# Altium PCB PCB3.PcbDoc
Units mil, origin at the board's own origin, x right, y up, seen from the top; angles counter-clockwise.
Board outline 1180 x 1360 mil, 2 copper layers (Top Layer, Bottom Layer); 12 components, 12 nets, 28 pads, 2 vias.
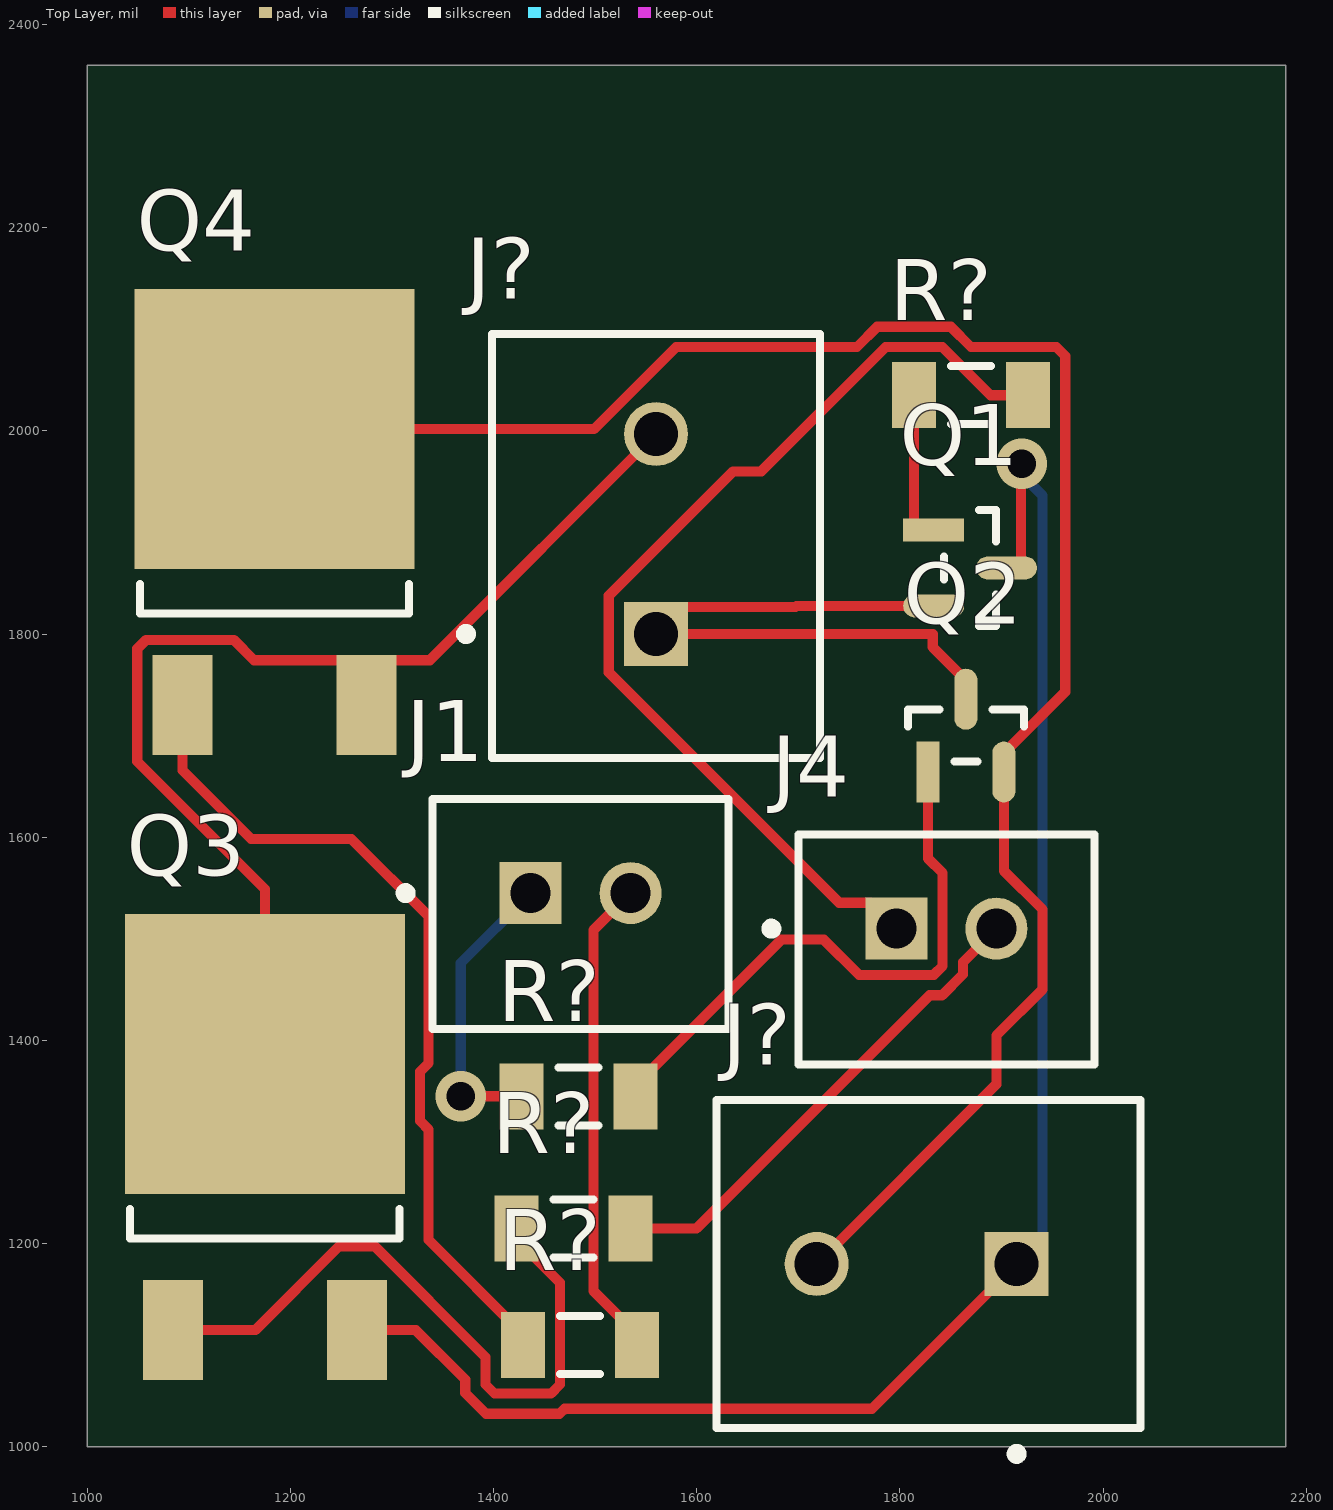
[diagram p0: Top Layer view]
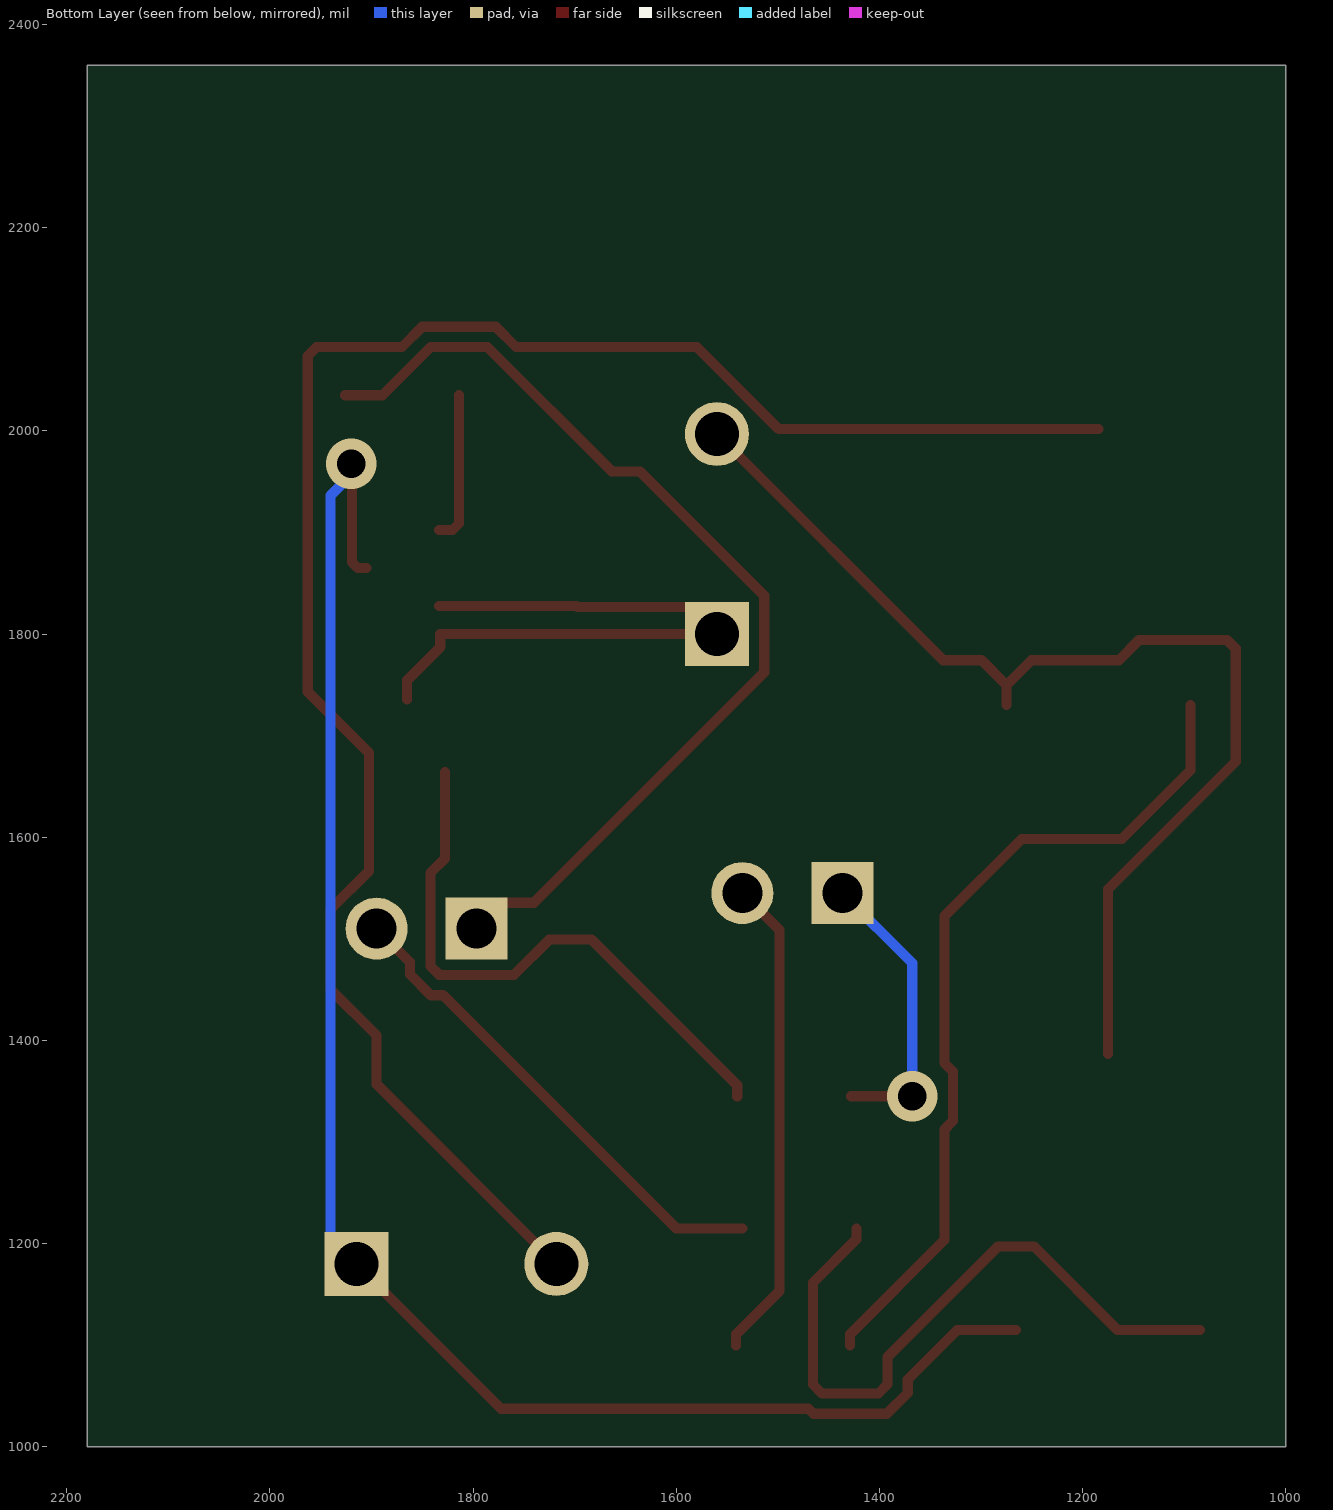
[diagram p1: Bottom Layer view, seen from below]
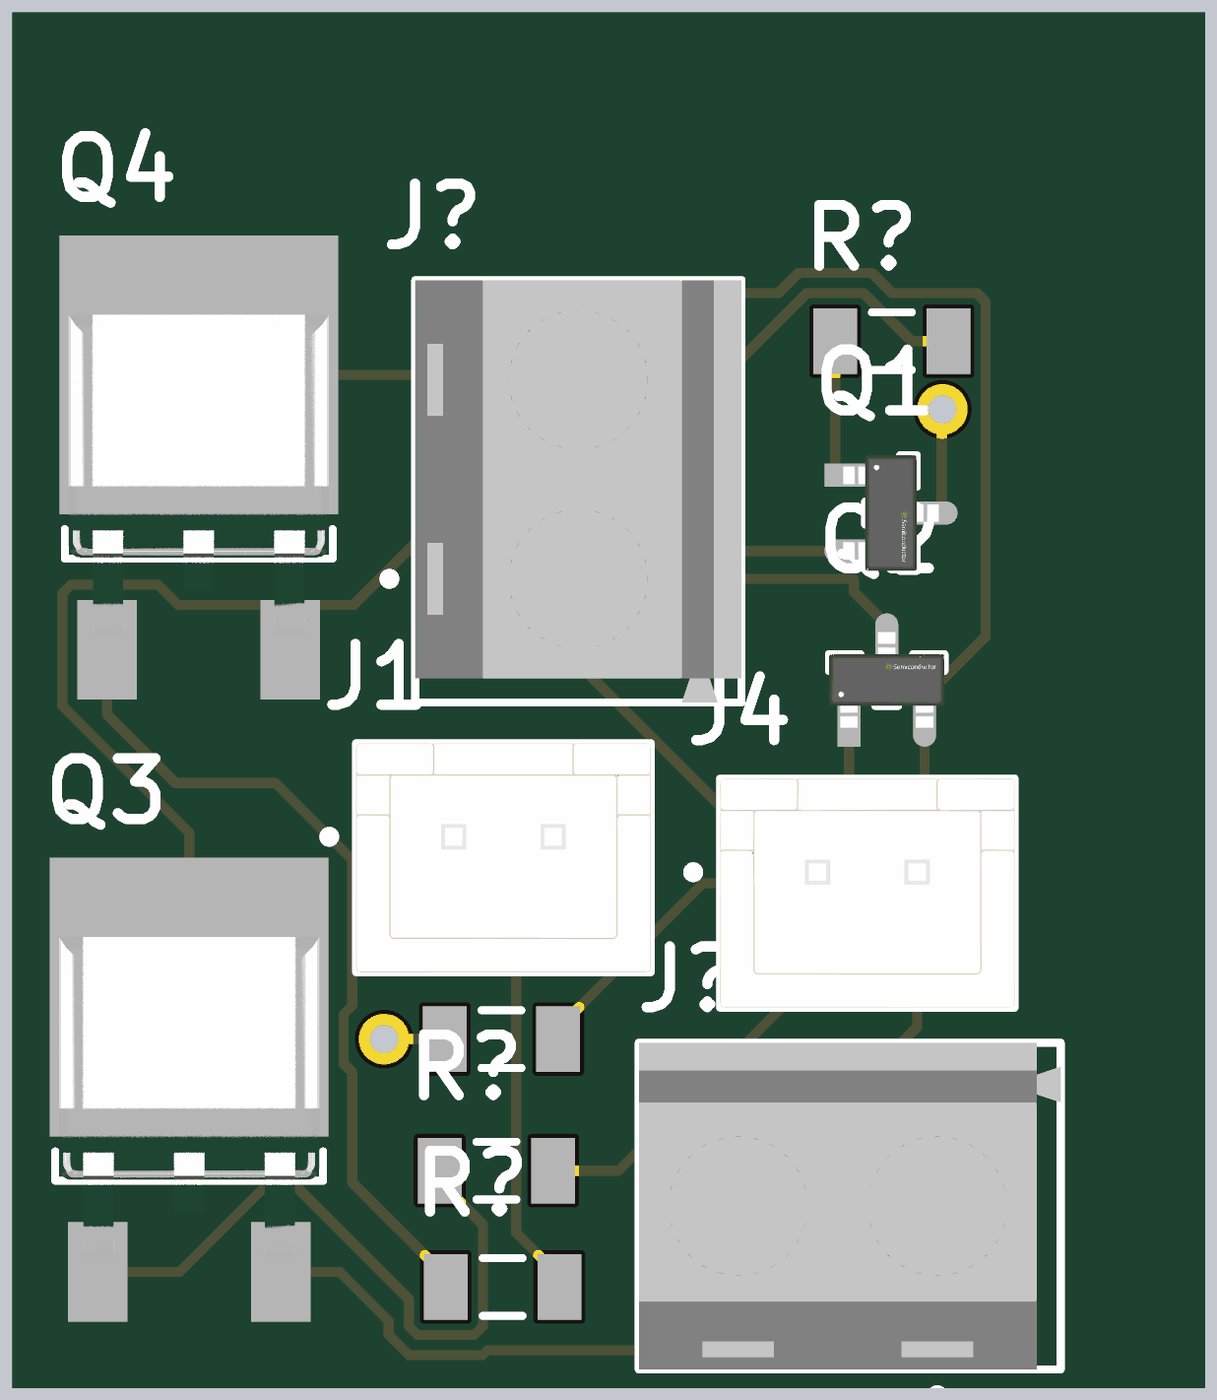
[diagram p2: 3D render of the assembled board from above, using the file's embedded part models]

## Layer stack, top to bottom
Top Solder: solder mask 0.4, Solder Resist, Dk 3.5
Top Layer: signal copper 1.4
Dielectric 1: dielectric 12.6, FR-4, Dk 4.8
Bottom Layer: signal copper 1.4
Bottom Solder: solder mask 0.4, Solder Resist, Dk 3.5

## Board outline
1000,1000 2180,1000 2180,2360 1000,2360

## Design rules (kind name [scope] priority, off if disabled: settings)
Clearance [All] p1: gap=10 ignorepadtopadclearanceinfootprint=FALSE
PolygonConnect [All] p1: connectstyle=Relief reliefconductorwidth=10 reliefentries=4 polygonreliefangle="90 Angle" airgapwidth=10
RoutingVias [All] p1: holewidth=28 width=50 viastyle="Through Hole" minholewidth=28 minwidth=50 maxholewidth=28 maxwidth=50
SolderMaskExpansion [All] p1: expansion=4 istentingtop=FALSE
SupplyNets "Schematic Supply Nets_1" [InNet('+12')] p1: voltage=0.000
SupplyNets "Schematic Supply Nets" [InNet('GND')] p2: voltage=0.000
Width [All] p1: maxlimit=10 minlimit=10 preferedwidth=10
30 further rules are at their usual default settings.

## Classes and differential pairs
component class Sheet1: J1 J4 J? Q1 Q2 Q3 Q4 R?

## Components (designator, comment, footprint, x,y, rotation, side; value= is the part's Value field where it differs from the comment)
J1 "B2B-XH-A(LF)(SN)" FP-B2B-XH-A_LF_SN-MFG 1485.79,1524.33 r0 top
J4 "B2B-XH-A(LF)(SN)" FP-B2B-XH-A_LF_SN-MFG 1845.79,1489.33 r0 top
J? "282836-2" TECO-282836-2_V 1560,1898.43 r90 top
J? "282836-2" TECO-282836-2_V 1816.57,1180 r180 top
Q1 "BSS138" FP-318-08-IPC_B 1869.17,1865 r0 top
Q2 "BSS138" FP-318-08-IPC_B 1865,1700 r90 top
Q3 "IRFR5410TRPBF" FP-PG-TO252-3-MFG 1175,1295 r0 top
Q4 "IRFR5410TRPBF" FP-PG-TO252-3-MFG 1184.45,1910.12 r0 top
R? "ERJ-8GEY0R00V" RESC3216X70X50NL05T20 1870,2035 r0 top
R? "ERJ-8GEY0R00V" RESC3216X70X50NL05T20 1483.9,1345 r0 top
R? "ERJ-8GEY0R00V" RESC3216X70X50NL05T20 1478.9,1215 r0 top
R? "ERJ-8GEY0R00V" RESC3216X70X50NL05T20 1485,1100 r180 top

## Footprints (in the part's own frame and the unit in brackets; to place one, negate y for a bottom-side part, rotate by r counter-clockwise, add the part's x,y. Pads: shape width x height; smd on the part's side, far side on the other; paste and mask are expansions set on the pad)
FP-318-08-IPC_B [mm]
  rect 1.524x0.578 smd paste+0 mask+0: 1(-0.91,0.95)
  rrect100% 1.524x0.578 smd paste+0 mask+0: 2(-0.91,-0.95) 3(0.91,0)
  silkscreen extent -0.65,-1.45 0.65,1.45, body extent -1.92,-1.7 1.92,1.7, height 0.25
FP-B2B-XH-A_LF_SN-MFG [mm]
  rect 1.55x1.55 hole 1 paste-2539.97 mask+0: 1(-1.25,0.525)
  round 1.55 hole 1 paste-2539.97 mask+0: 2(1.25,0.525)
  silkscreen extent -4.5,-2.88 3.7,2.88, body extent -3.8,-2.98 3.8,2.98, height 0.25
FP-PG-TO252-3-MFG [mm]
  rect 1.5x2.5 smd paste+0 mask+0: 1(-2.3,-4.575) 3(2.3,-4.575)
  rect 7x7 smd paste+0 mask+0: 4(0,2.325)
  silkscreen extent -3.36,-2.28 3.36,-1.55, body extent -3.6,-5.92 3.6,5.92, height 0.25
RESC3216X70X50NL05T20 [mm] "Chip Resistor, 2-Leads, Body 3.20x1.60mm, IPC Medium Density"
  rect 1.1x1.65 smd: 1(-1.425,0) 2(1.425,0)
  silkscreen extent -0.5,-0.72 0.5,0.72, body extent -1.63,-0.82 1.62,0.82, height 0.7
TECO-282836-2_V [mm] "Female Header, Pitch 5mm, 1 x 2 Position, Height 10mm"
  rect 1.6x1.6 hole 1.1: 1(-2.5,0)
  round 1.6 hole 1.1: 2(2.5,0)
  silkscreen extent -5.6,-4.1 5,4.87, body extent -5.6,-4.1 5,4.1, height 10

## Part data
J1 J4: library part CMP-2000-05888-3, "CONN HEADER VERT 2POS 2.5MM", Color=Natural, Contact Resistance=20mR, Current Rating=3A, Housing Color=White, Insulation Resistance=1GR, Max Operating Temperature=85°C, Max Voltage Rating (AC)=250V, Min Operating Temperature=-25°C, Connector Type="Male Pin", Contact Material=Brass, Contact Plating=Tin, Contact Type="Male Pin", Depth=5.75mm, Fastening Type=Detent, Housing Material=Polyamide, Lead Free="Lead Free", Lead Pitch=2.5mm, Length=7.4mm, Max Current Rating=3A, Max Voltage Rating (DC)=250V, Mount="Through Hole", Number of Contacts=2, Number of Positions=2, Number of Rows=1, Orientation=Straight, Packaging=Bulk, Pitch=2.5mm, REACH SVHC="No SVHC", Series=XH, Termination=Solder, Voltage Rating=250V, Voltage Rating (AC)=250V, Wire/Cable Gauge=22AWG
J? J?: library part CMP-1684-00017-1, "Female Header, Pitch 5 mm, 1 x 2 Position, Height 10 mm, Tail Length 3.5 mm, Rohs, Bulk", Color=Green, Current=13.5A, Manufacturer="TE Connectivity", Package Description="Female Header, Pitch 5 mm, 1 x 2 Position, Height 10 mm, Tail Length 3.5 mm", Package Reference=THD, Standard Package=300, Voltage=300V, 3D Model=282836-2.pdf, Category=Connectors,Interconnects, Clamp Material - Plating=Brass-NickelPlated, Contact Material - Plating=Brass-TinPlated, Datasheet URL=http://www.te.com.cn/commerce/DocumentDelivery/DDEController?Action=showdoc&DocId=Catalog+Section%7F1308389_EUROSTYLE_TERMINAL_BLOCKS%7F0607%7Fpdf%7FEnglish%7FENG_CS_1308389_EUROSTYLE_TERMINAL_BLOCKS_0607.pdf%7F282836-2, Dynamic Catalog=BuchananSeries, Family=TerminalBlocks-WiretoBoard, Featured Product=EurostyleTerminalBlockConnectors, Features=Interlocking(Side), Housing Material=Polyamide(PA66),Nylon6/6, Manufacturer URL=http://www.te.com, Mating Orientation=HorizontalwithBoard, Mounting Type=ThroughHole, Number of Levels=1, Other Names="5ULV-02B / A98076", Packaging=Bulk, Pitch="0.197\"(5.00mm)", Positions Per Level=2, Product Training Modules=Wire-to-BoardEurostyleTerminalBlocks, RoHS Information=282836-2StatementofCompliance, Screw Material - Plating=Brass-NickelPlated, Screw Thread=M3, Series=Buchanan, Torque - Screw=0.68Nm(6Lb-In), Wire Gauge=16-30AWG, Wire Termination=Screw-RisingCageClamp
Q1 Q2: library part CMP-07173-000101-1, "MOSFET N-CH 50V 220MA SOT-23", Case/Package=SOT-23, Continuous Drain Current (ID)=220mA, Drain to Source Breakdown Voltage=50V, Drain to Source Resistance=3.5R, Gate to Source Voltage (Vgs)=20V, Input Capacitance=27pF, Max Operating Temperature=150°C, Max Power Dissipation=360mW, Min Operating Temperature=-55°C, On-State Resistance=6R, Package Quantity=1, Threshold Voltage=1.3V, Contact Plating=Tin, Current Rating=220mA, Drain to Source Voltage (Vdss)=50V, Dual Supply Voltage=50V, Element Configuration=Single, Fall Time=9ns, Height=0.93mm, Lead Free="Lead Free", Length=2.92mm, Mount="Surface Mount", Nominal Vgs=1.3V, Number of Elements=1, Number of Pins=3, Packaging="Tape and Reel", Power Dissipation=360mW, Radiation Hardening=No, Rds On Max=3.5R, REACH SVHC="No SVHC", Rise Time=9ns, Termination=SMD/SMT, Turn-Off Delay Time=20ns, Turn-On Delay Time=2.5ns, Voltage Rating (DC)=50V, Weight=0.03g, Width=1.3mm
Q3 Q4: library part CMP-32901-000090-1, "MOSFET P-CH 100V 13A DPAK", Continuous Drain Current=-13A, Drain to Source Breakdown Voltage=-100V, Drain to Source Resistance=0.205Ω, Gate To Source Voltage=20V, Input Capacitace At Vds="760pF @ -25V", Manufacturer=Infineon, Max Forward Diode Voltage=-1.6V, Max Junction Temp=+150°C, Package=PG-TO252-3, Power Dissipation=66W, Pulse Drain Current=-52A, Temperature="-55°C to +150°C", Temperature Range Low=-55°C, Automotive=No, Category=Trans, ComponentLink2Description=Datasheet, ComponentLink2URL=https://www.infineon.com/dgdl/irfr5410pbf.pdf?fileId=5546d462533600a4015356356f622107, Depletion Mode=False, Device Class L1="Discrete Semiconductors", Device Class L2=Transistors, Device Class L3=MOSFETs, Digikey Description="MOSFET P-CH 100V 13A DPAK", Drain To Source Voltage=-100V, Footprint Url=http://www.irf.com/package/hexfet/dpakfootprint.pdf, Gate Charge At Vgs="58nC @ -10V", Height=2.52mm, Lead Free=Yes, Manufacturer Part Number=IRFR5410TRPBF, Number Of Channels=1, Number Of P Channels=1, Octopart=https://octopart.com/irfr5410trpbf-infineon-65874169, Reverse Recovery Charge=650nC, Reverse Recovery Time=130ns, RoHS=TRUE, Rthja Max=50°C/W, Temperature Range High=+150°C, Threshold Vgs Max=-4V, Threshold Vgs Min=-2V, Turn Off Delay Time=45ns, Turn On Delay Time=15ns
R? R? R? R?: library part CMP-2003-00541-1, Manufacturer=Panasonic, Part Number=ERJ-8GEY0R00V

## Via types
v1: diameter 50, hole 28, Top Layer to Bottom Layer, 2 vias

## Nets (pads, with @x,y where several pads share a name; then routed paths per layer and width w, separated by ;. In a path a pad name is that pad's centre, name@x,y a point inside that pad or via, vN(x,y) a via of type N, cw(c..) or ccw(c..) an arc to the next point about the centre after c; other vN are vias at no path point)
+12: J?.1@1560,1800 Q1.2 Q2.3 | length 634.8
  Top Layer w10: Q1.2 1698.21,1827.6 1697.1,1826.5 1586.5,1826.5 1560,1800 1832.4,1800 1832.4,1787.06 1865,1754.46 Q2.3
GND: J?.2@1560,1996.85 Q3.4 Q4.3 | length 1105.7
  Top Layer w10: Q3.4 1175,1548.94 1049.37,1674.57 1049.37,1785.43 1058.16,1794.21 1144.31,1794.21 1164.31,1774.21 1250.47,1774.21 Q4.3@1275,1749.68 ; Q4.3 Q4.3@1275,1749.68 ; J?.2@1560,1996.85 1337.36,1774.21 1299.53,1774.21 Q4.3@1275,1749.68
NetJ1_1: J1.1 R?.1@1427.8,1345 | length 300.9
  Top Layer w10: v1(1367.8,1345) R?.1@1427.8,1345 ; J1.1@1427.8,1536.22 J1.1
  Bottom Layer w10: v1(1367.8,1345) 1367.8,1476.22 J1.1
NetJ1_2: J1.2 R?.1@1541.1,1100 | length 477.9
  Top Layer w10: J1.2 1498.35,1508.35 1498.35,1153.58 1541.1,1110.83 R?.1@1541.1,1100
NetJ4_1: J4.1 R?.2@1926.1,2035 | length 996.6
  Top Layer w10: J4.1 1771.06,1535.51 1740.28,1535.51 1513.5,1762.29 1513.5,1837.71 1635.89,1960.09 1663.65,1960.09 1786.03,2082.48 1841.76,2082.48 1889.24,2035 R?.2@1926.1,2035
NetJ4_2: J4.2 R?.2@1535,1215 | length 489.3
  Top Layer w10: R?.2@1535,1215 1600,1215 1829.49,1444.49 1841.58,1444.49 1862.09,1464.99 1862.09,1477.09 J4.2
NetJ?_1: J?.1@1915,1180 Q1.3 Q3.3 | length 1672.7
  Top Layer w10: Q3.3 1323.67,1114.88 1372.24,1066.31 1372.24,1053.02 1392.75,1032.52 1465.05,1032.52 1470.05,1037.52 1772.52,1037.52 J?.1@1915,1180 ; Q1.3 1913.42,1865 1919.31,1870.89 1919.31,1966.83 v1(1920,1967.52)
  Bottom Layer w10: J?.1@1915,1180 1940.51,1205.51 1940.51,1936.18 1920,1956.7 v1(1920,1967.52)
NetJ?_2: J?.2@1718.15,1180 Q2.2 Q4.4 | length 1858.6
  Top Layer w10: Q4.4 1499.05,2001.65 1579.87,2082.48 1757.75,2082.48 1777.75,2102.48 1850.05,2102.48 1870.05,2082.48 1953.97,2082.48 1962.76,2073.69 1962.76,1743.15 1902.4,1682.79 Q2.2 1902.4,1566.96 1940.51,1528.85 1940.51,1450.32 1895,1404.81 1895,1356.85 J?.2@1718.15,1180
NetQ1_1: Q1.1 R?.1@1813.9,2035 | length 148.3
  Top Layer w10: R?.1@1813.9,2035 1813.9,1908.78 1820.28,1902.4 Q1.1
NetQ2_1: Q2.1 R?.2@1540,1345 | length 587.2
  Top Layer w10: R?.2@1540,1345 1540,1355.83 1683.32,1499.15 1725.19,1499.15 1759.85,1464.49 1833.3,1464.49 1842.09,1473.28 1842.09,1564.8 1827.6,1579.29 Q2.1
NetQ3_1: Q3.1 R?.1@1422.8,1215 | length 666
  Top Layer w10: Q3.1 1165.6,1114.88 1247.99,1197.28 1283.11,1197.28 1392.24,1088.14 1392.24,1061.31 1401.03,1052.52 1456.76,1052.52 1465.55,1061.31 1465.55,1161.42 1422.8,1204.17 R?.1@1422.8,1215
NetQ4_1: Q4.1 R?.2@1428.9,1100 | length 833.5
  Top Layer w10: Q4.1 1093.9,1665.79 1161.52,1598.17 1260.17,1598.17 1336.21,1522.13 1336.21,1377.78 1327.8,1369.36 1327.8,1320.64 1336.21,1312.22 1336.21,1203.52 1428.9,1110.83 R?.2@1428.9,1100